# Altium PCB triple_integrated_driver_stepper_motor_controller_arduino_shield.pcbdoc (part 1 of 2)
Units mil, origin at the board's own origin, x right, y up, seen from the top; angles counter-clockwise.
Board outline 5050 x 3825 mil, 2 copper layers (Top Layer, Bottom Layer); 76 components, 119 nets, 386 pads, 303 vias.
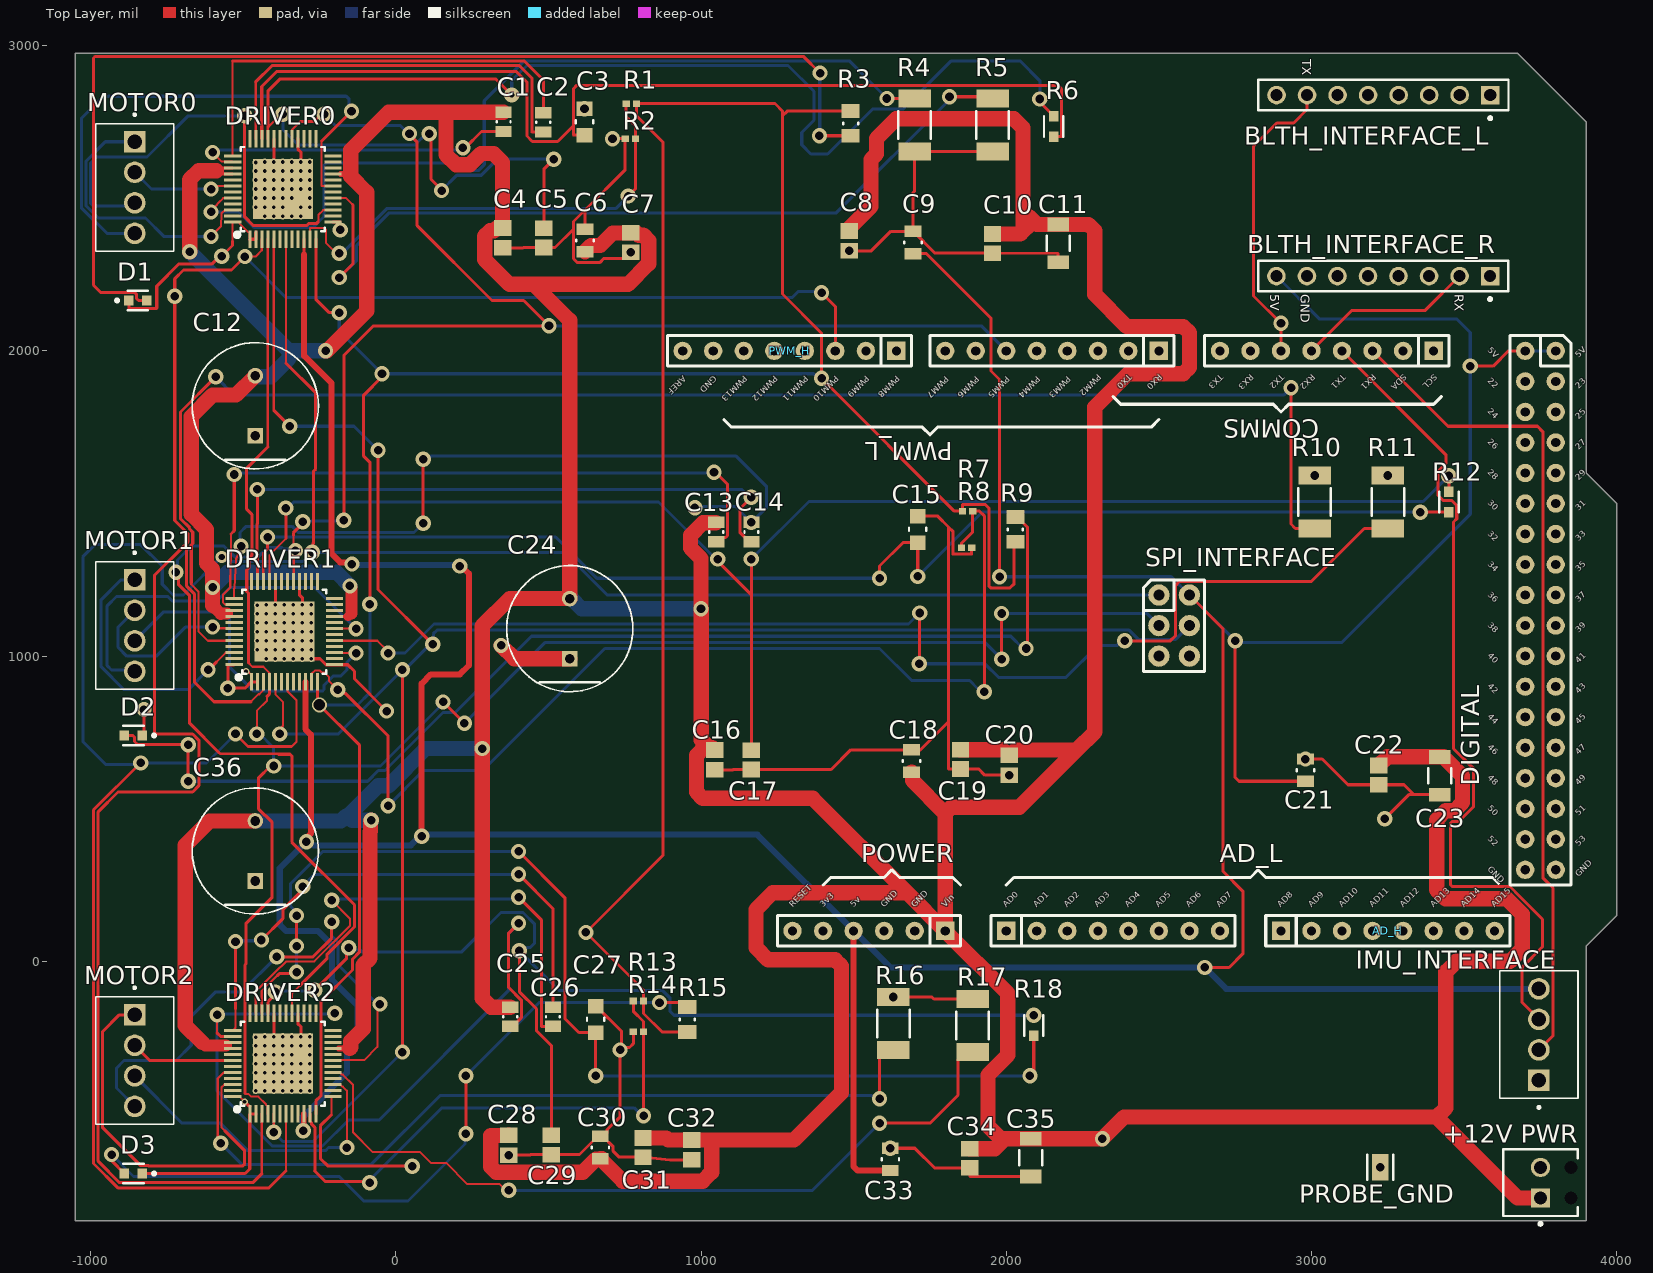
[diagram p0: Top Layer view]
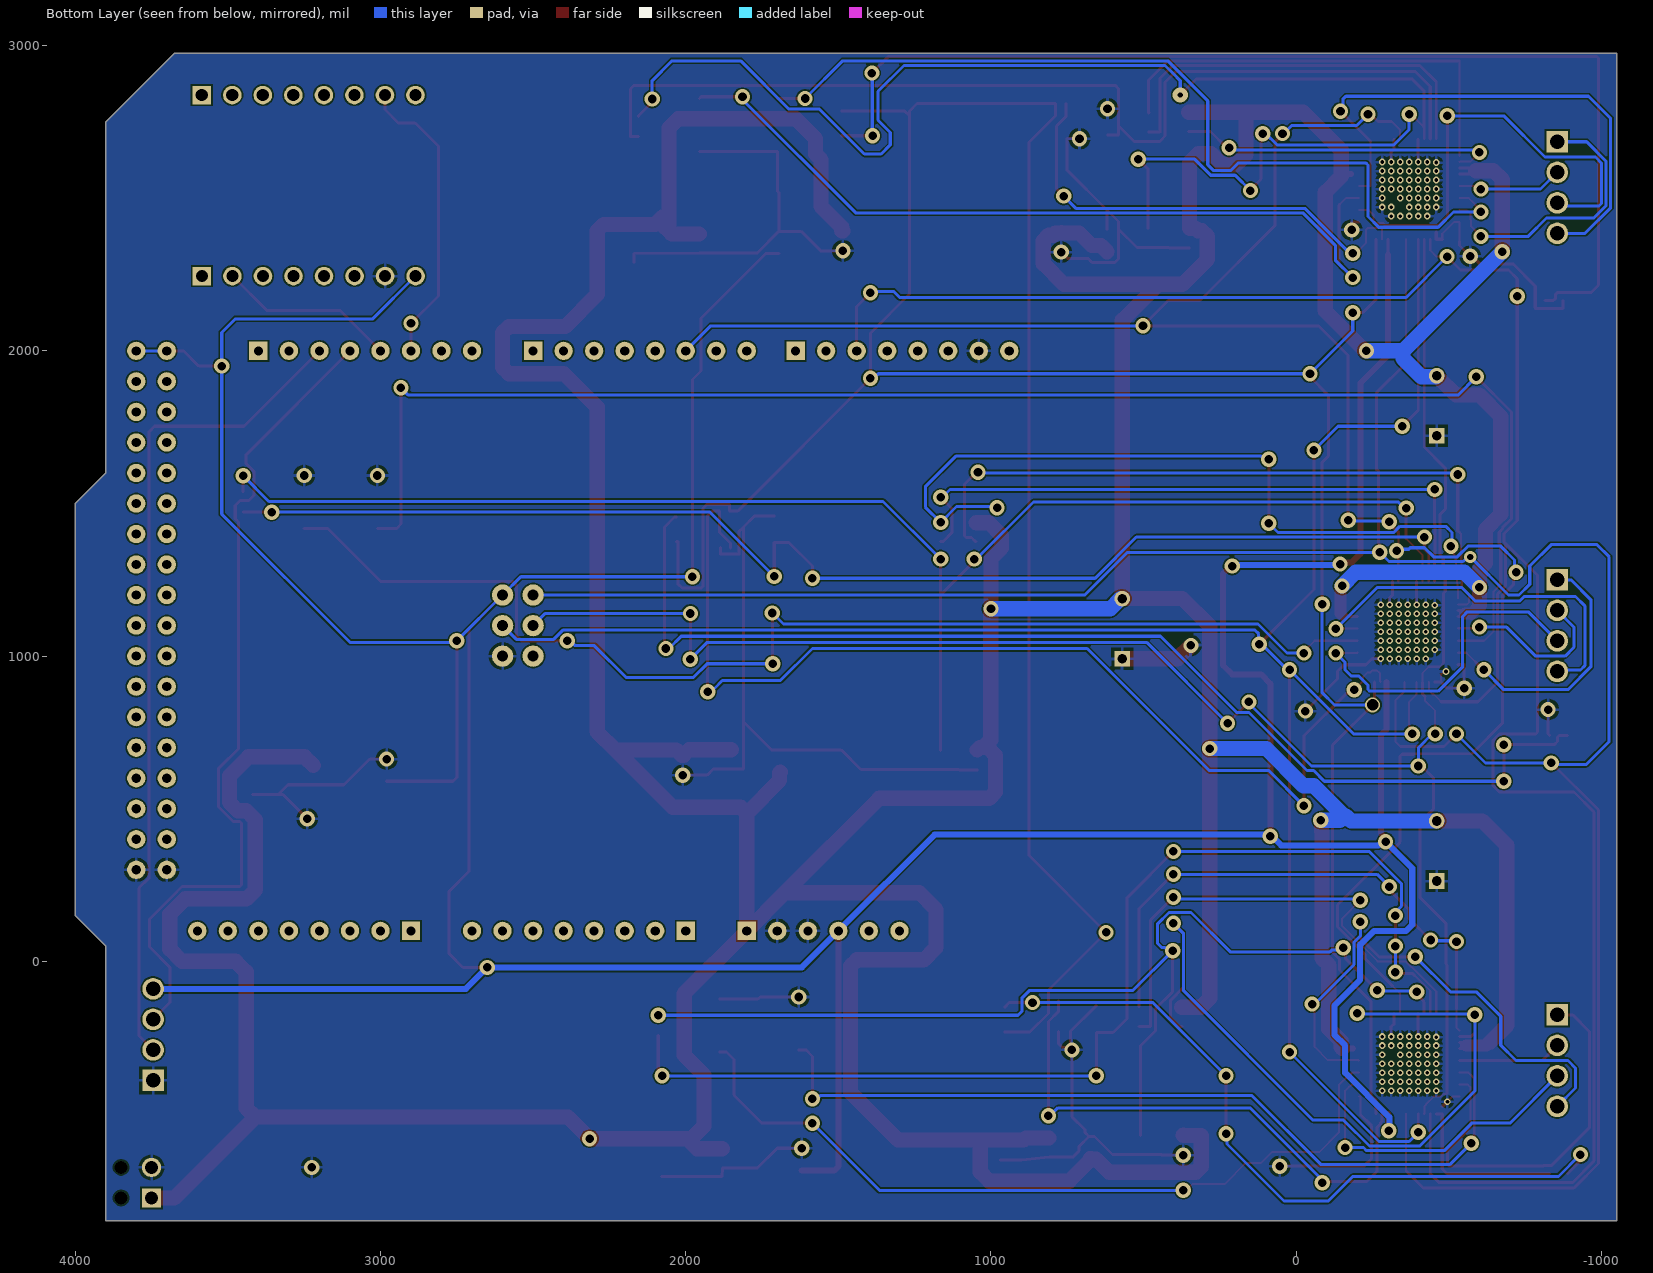
[diagram p1: Bottom Layer view, seen from below]
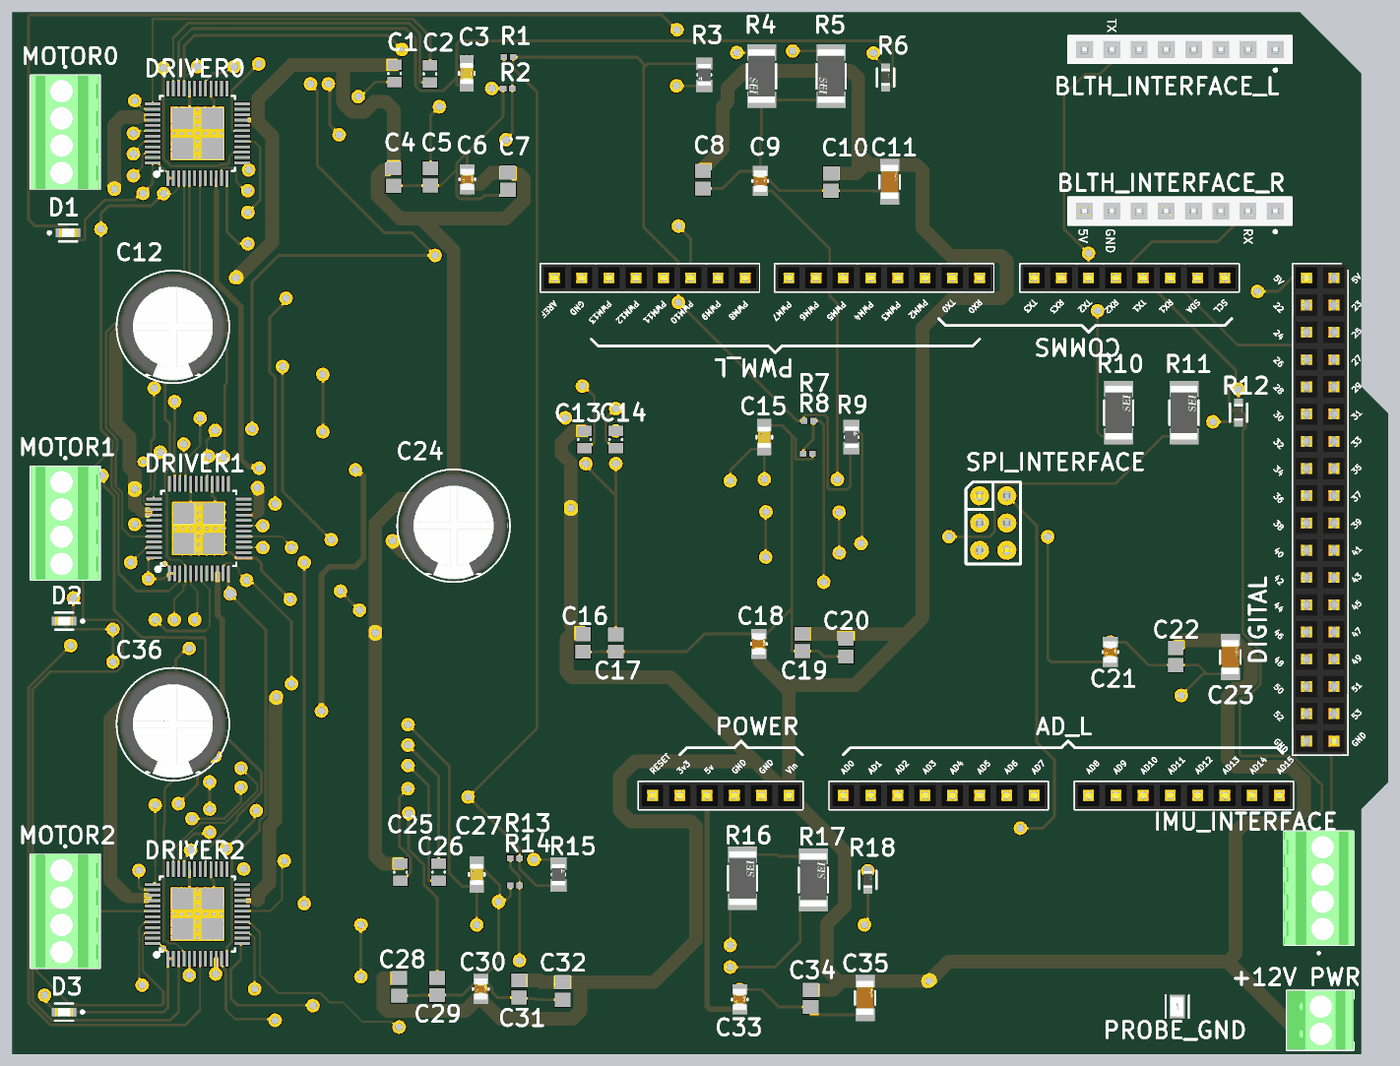
[diagram p3: 3D render of the assembled board from above, using the file's embedded part models]

## Layer stack, top to bottom
Top Solder: solder mask 0.4, Solder Resist, Dk 3.5
Top Layer: signal copper 1.4
Dielectric1: dielectric 12.6, FR-4, Dk 4.8
Bottom Layer: signal copper 1.4
Bottom Solder: solder mask 0.4, Solder Resist, Dk 3.5

## Board outline
-1050,-850 -1050,2975 3675,2975 3900,2750 3900,1600 4000,1500 4000,150 3900,50 3900,-850

## Design rules (kind name [scope] priority, off if disabled: settings)
Clearance [All] p1: gap=5 ignorepadtopadclearanceinfootprint=TRUE
HoleToHoleClearance [All] p1 off: gap=10 allowstackedmicrovias=TRUE
MinimumSolderMaskSliver [All] p1 off: minsoldermaskwidth=4
NetAntennae [All] p1 off: netantennaetolerance=1
PolygonConnect [All] p1: connectstyle=Relief reliefconductorwidth=10 reliefentries=4 polygonreliefangle="90 Angle" airgapwidth=10
RoutingVias [All] p1: holewidth=28 width=50 viastyle="Through Hole" minholewidth=3 minwidth=10 maxholewidth=28 maxwidth=50
SMDNeckDown [All] p1 off: percent=70.000
SilkToSilkClearance [All] p1 off: silktosilkclearance=10
SilkToSolderMaskClearance SilkscreenOverComponentPads [IsPad] p1: minsilkscreentomaskgap=5 clearancetoexposedcopper=TRUE
SolderMaskExpansion [All] p1: expansion=4 istentingtop=FALSE
SupplyNets "Schematic Supply Nets_3" [InNet('VCC_IO')] p1: voltage=0.000
SupplyNets "Schematic Supply Nets" [InNet('CLK16')] p2: voltage=0.000
SupplyNets "Schematic Supply Nets_2" [InNet('VIN')] p3: voltage=0.000
UnRoutedNet [All] p1: checkbadconnections=TRUE
Width [All] p1: maxlimit=60 minlimit=6 preferedwidth=10 minimp=50.000000 maximp=50.000000 favimp=50.000000
24 further rules are at their usual default settings.

## Classes and differential pairs
component class motor2_control: C25 C26 C27 C28 C29 C30 C31 C32 C33 C34 C35 C36 D3 DRIVER2 MOTOR2 R13 R14 R15 R16 R17 R18
component class motor1_control: C13 C14 C15 C16 C17 C18 C19 C20 C21 C22 C23 C24 D2 DRIVER1 MOTOR1 R7 R8 R9 R10 R11 R12
component class motor0_control: C1 C2 C3 C4 C5 C6 C7 C8 C9 C10 C11 C12 D1 DRIVER0 MOTOR0 R1 R2 R3 R4 R5 R6
component class interface_shield_with_microcontroller_board: "+12V PWR" AD_H AD_L Analog BLTH_INTERFACE_L BLTH_INTERFACE_R COMMS DIGITAL IMU_INTERFACE POWER PROBE_GND PWM_H PWM_L SPI_INTERFACE

## Components (designator, comment, footprint, x,y, rotation, side; value= is the part's Value field where it differs from the comment)
"+12V PWR" "1725656" PHOE-1725656-2 3750,-725 r90 top
AD_H "AD_H" "Header 8x1 8.5mm" 2900,100 r0 top locked
AD_L "AD_L" "Header 8x1 8.5mm" 2000,100 r0 top locked
BLTH_INTERFACE_L "PPPC081LFBN-RC" SLIN-PPPC081LFBN-RC_V 3235.39,2837.91 r180 top
BLTH_INTERFACE_R "PPPC081LFBN-RC" SLIN-PPPC081LFBN-RC_V 3235,2245 r180 top
C1 "CAP 4.7uF 10V 0805(2012)" CAPC0805(2012)155_L 353.27,2750 r90 top value=4.7uF
C2 "CAP 4.7uF 10V 0805(2012)" CAPC0805(2012)155_L 483.27,2748.5 r90 top value=4.7uF
C3 "VJ0805Y103KXACW1BC" FP-VJ0805-MFG 618.27,2750 r90 top
C4 "VJ0805Y104KXAMR" CAPC2013X145X48NL20T23 350,2370 r90 top
C5 "C0805S104K5RACTU" CAPC2013X145X50NL20T25 485,2370 r90 top
C6 "CC0805KKX7R7BB475" FP-CC0805-0_85-MFG 620,2361.42 r90 top value="4.7 uF"
C7 "C0805S104K5RACTU" CAPC2013X145X50NL20T25 770,2355 r90 top
C8 "VJ0805Y223KXAAC" CAPC2013X145X48NL20T23 1485,2360 r90 top
C9 "CC0805KFX7R7BB474" FP-CC0805-0_85-MFG 1695,2355 r90 top value="470 nF"
C10 "C0805S104K5RACTU" CAPC2013X145X50NL20T25 1955,2351.5 r90 top
C11 "GRM31CZ72A475KE11L" FP-GRM31C-0_3-e0_3_0_9-MFG 2170,2352.01 r90 top
C12 "EEUFS2A151L" FP-RAD-TH-D_10_0_5-L_25_2-MFG -460,1820 r90 top
C13 "CAP 4.7uF 10V 0805(2012)" CAPC0805(2012)155_L 1050,1406.5 r90 top value=4.7uF
C14 "CAP 4.7uF 10V 0805(2012)" CAPC0805(2012)155_L 1165,1406.5 r90 top value=4.7uF
C15 "VJ0805Y103KXACW1BC" FP-VJ0805-MFG 1710,1415 r90 top
C16 "VJ0805Y104KXAMR" CAPC2013X145X48NL20T23 1045,660 r90 top
C17 "C0805S104K5RACTU" CAPC2013X145X50NL20T25 1165,660 r90 top
C18 "CC0805KKX7R7BB475" FP-CC0805-0_85-MFG 1690,656.42 r90 top value="4.7 uF"
C19 "C0805S104K5RACTU" CAPC2013X145X50NL20T25 1850,661.5 r90 top
C20 "VJ0805Y223KXAAC" CAPC2013X145X48NL20T23 2010,642.48 r90 top
C21 "CC0805KFX7R7BB474" FP-CC0805-0_85-MFG 2980,626.42 r90 top value="470 nF"
C22 "C0805S104K5RACTU" CAPC2013X145X50NL20T25 3220,610 r90 top
C23 "GRM31CZ72A475KE11L" FP-GRM31C-0_3-e0_3_0_9-MFG 3420,607.99 r90 top
C24 "EEUFS2A151L" FP-RAD-TH-D_10_0_5-L_25_2-MFG 570,1090 r90 top
C25 "CAP 4.7uF 10V 0805(2012)" CAPC0805(2012)155_L 375,-181.5 r90 top value=4.7uF
C26 "CAP 4.7uF 10V 0805(2012)" CAPC0805(2012)155_L 515,-181.5 r90 top value=4.7uF
C27 "VJ0805Y103KXACW1BC" FP-VJ0805-MFG 655,-190 r90 top
C28 "VJ0805Y104KXAMR" CAPC2013X145X48NL20T23 370,-602.48 r90 top
C29 "C0805S104K5RACTU" CAPC2013X145X50NL20T25 510,-601.5 r90 top
C30 "CC0805KKX7R7BB475" FP-CC0805-0_85-MFG 670,-610 r90 top value="4.7 uF"
C31 "C0805S104K5RACTU" CAPC2013X145X50NL20T25 810,-610 r90 top
C32 "VJ0805Y223KXAAC" CAPC2013X145X48NL20T23 970,-617.52 r90 top
C33 "CC0805KFX7R7BB474" FP-CC0805-0_85-MFG 1620,-648.58 r90 top value="470 nF"
C34 "C0805S104K5RACTU" CAPC2013X145X50NL20T25 1880,-645 r90 top
C35 "GRM31CZ72A475KE11L" FP-GRM31C-0_3-e0_3_0_9-MFG 2080,-642.99 r90 top
C36 "EEUFS2A151L" FP-RAD-TH-D_10_0_5-L_25_2-MFG -460,361.58 r90 top
COMMS "Communication" "Header 8x1 8.5mm" 3400,2000 r180 top
D1 "LTST-C193TBKT-5A" FP-LTST-C193TBKT-5A-MFG -845,2165 r0 top
D2 "LTST-C193TBKT-5A" FP-LTST-C193TBKT-5A-MFG -859.53,740 r180 top
D3 "LTST-C193TBKT-5A" FP-LTST-C193TBKT-5A-MFG -859.53,-695 r180 top
DIGITAL "IO_36" "HEADER 36X 8MM" 3800,2000 r270 top locked
DRIVER0 "TMC5130A-TA" TMC5130_TQFP48-EP_0.5_7.0X7.0 -370,2530 r0 top
DRIVER1 "TMC5130A-TA" TMC5130_TQFP48-EP_0.5_7.0X7.0 -365,1080 r0 top
DRIVER2 "TMC5130A-TA" TMC5130_TQFP48-EP_0.5_7.0X7.0 -370,-335 r0 top
IMU_INTERFACE "Comment" TE_282834-4 3745,-240 r90 top
MOTOR0 "Comment" TE_282834-4 -855,2535 r270 top
MOTOR1 "Comment" TE_282834-4 -855,1100 r270 top
MOTOR2 "Comment" TE_282834-4 -855,-325 r270 top
POWER "POWER" "Header 6x1 8.5mm" 1800,100 r180 top locked
PROBE_GND "S2751-46R" FP-S2751-46R-MFG 3225,-675 r90 top
PWM_H "PWM_H" "Header 8x1 8.5mm" 1640,2000 r180 top locked
PWM_L "PWM_L" "Header 8x1 8.5mm" 2500,2000 r180 top locked
R1 "RC0402JR-100RL" RESC1005X40X25NL05T10 771.54,2810 r180 top
R2 "RC0402JR-100RL" RESC1005X40X25NL05T10 768.27,2695 r180 top
R3 "MCU0805MD1001BP100" FP-MCU0805-IPC_A 1490,2745 r270 top
R4 "RMCF2010JTR100" FP-RMCF2010-IPC_B 1700,2740 r270 top
R5 "RMCF2010JTR100" FP-RMCF2010-IPC_B 1955,2740 r270 top
R6 "RT0603BRD072R2L" FP-RT0603-MFG 2155,2735 r90 top value=2.2Ω
R7 "RC0402JR-100RL" RESC1005X40X25NL05T10 1873.27,1475 r0 top
R8 "RC0402JR-100RL" RESC1005X40X25NL05T10 1870,1355 r0 top
R9 "MCU0805MD1001BP100" FP-MCU0805-IPC_A 2030,1415 r90 top
R10 "RMCF2010JTR100" FP-RMCF2010-IPC_B 3010,1505 r90 top
R11 "RMCF2010JTR100" FP-RMCF2010-IPC_B 3250,1505 r90 top
R12 "RT0603BRD072R2L" FP-RT0603-MFG 3450,1505 r90 top value=2.2Ω
R13 "RC0402JR-100RL" RESC1005X40X25NL05T10 795,-130 r180 top
R14 "RC0402JR-100RL" RESC1005X40X25NL05T10 795,-230 r180 top
R15 "MCU0805MD1001BP100" FP-MCU0805-IPC_A 955,-190.42 r90 top
R16 "RMCF2010JTR100" FP-RMCF2010-IPC_B 1630,-203.35 r90 top
R17 "RMCF2010JTR100" FP-RMCF2010-IPC_B 1890,-210 r90 top
R18 "RT0603BRD072R2L" FP-RT0603-MFG 2090,-210 r90 top value=2.2Ω
SPI_INTERFACE "ICSP" ICSP 2500,1200 r0 top

## Footprints (in the part's own frame and the unit in brackets; to place one, negate y for a bottom-side part, rotate by r counter-clockwise, add the part's x,y. Pads: shape width x height; smd on the part's side, far side on the other; paste and mask are expansions set on the pad)
CAPC0805(2012)155_L [mm] "Chip Capacitor, Body 2.0x1.2mm, Height 1.55mm, IPC High Density"
  rect 0.95x1.35 smd: 1(-0.8,0) 2(0.8,0)
  silkscreen extent -0.05,-0.58 0.05,0.58, body extent -1.1,-0.72 1.1,0.72, height 1.55
CAPC2013X145X48NL20T23 [mm] "Chip Capacitor, 2-Leads, Body 2.00x1.25mm, IPC Medium Density"
  rect 1.3x1.45 smd: 1(-0.825,0) 2(0.825,0)
  body extent -1.1,-0.72 1.1,0.72, height 1.45
CAPC2013X145X50NL20T25 [mm] "Chip Capacitor, 2-Leads, Body 2.00x1.25mm, IPC Medium Density"
  rect 1.3x1.45 smd: 1(-0.8,0) 2(0.8,0)
  body extent -1.1,-0.72 1.1,0.72, height 1.45
FP-CC0805-0_85-MFG [mm]
  rect 0.95x1.4 smd paste+0 mask+0: 1(-0.925,0) 2(0.925,0)
  silkscreen extent -0.07,-0.73 0.08,0.72, body extent -1.6,-1.05 1.6,1.05, height 0.25
FP-GRM31C-0_3-e0_3_0_9-MFG [mm]
  rect 1.15x1.8 smd paste+0 mask+0: 1(-1.575,0) 2(1.575,0)
  silkscreen extent -0.62,-0.95 0.62,0.95, body extent -2.25,-1.05 2.25,1.05, height 0.25
FP-LTST-C193TBKT-5A-MFG [mm]
  rect 0.8x0.8 smd paste+0 mask+0: 1(-0.75,0) 2(0.75,0)
  silkscreen extent -1.85,-0.8 0.85,0.8, body extent -1.25,-0.55 1.25,0.55, height 0.25
FP-MCU0805-IPC_A [mil]
  rect 45.62x59.38 smd paste+0 mask+0: 1(-40.42,0) 2(40.42,0)
  silkscreen extent -3,-25 3,25, body extent -83,-49 83,49, height 10
FP-RAD-TH-D_10_0_5-L_25_2-MFG [mm]
  rect 1.3x1.3 hole 0.8 paste-2539.97 mask+0: 1(-2.5,0)
  round 1.3 hole 0.8 paste-2539.97 mask+0: 2(2.5,0)
  silkscreen extent -5.25,-5.25 5.25,5.25, body extent -5.35,-5.35 5.35,5.35, height 0.25
FP-RMCF2010-IPC_B [mil]
  rect 59.22x106.54 smd paste+0 mask+0: 1(-86.65,0) 2(86.65,0)
  silkscreen extent -45,-53 45,53, body extent -126,-63 126,63, height 10
FP-RT0603-MFG [mm]
  rect 0.9x0.8 smd paste+0 mask+0: 1(-0.85,0) 2(0.85,0)
  silkscreen extent -0.85,-0.81 0.86,0.8, body extent -1.4,-0.55 1.4,0.55, height 0.25
FP-S2751-46R-MFG [mm]
  rect 2.2x1.4 smd paste+0 mask+0: 1(0,0)
  silkscreen extent -1.05,-1.07 1.05,1.07, body extent -1.2,-0.8 1.2,0.8, height 0.25
FP-VJ0805-MFG [mm]
  rect 1.2x1.3 smd paste+0 mask+0: 1(-1.1,0) 2(1.1,0)
  silkscreen extent -0.12,-0.73 0.13,0.73, body extent -1.8,-0.82 1.8,0.82, height 0.25
"Header 6x1 8.5mm" [mil] "Stackable 6 pin header"
  rect 60x60 hole 30: 1(0,0)
  round 60 hole 30: 2(100,0) 3(200,0) 4(300,0) 5(400,0) 6(500,0)
  silkscreen extent -50,-50 550,50, body extent -50,-50 550,50, height 335
"Header 8x1 8.5mm" [mil] "Stackable 8 pin header"
  rect 60x60 hole 30: 1(0,0)
  round 60 hole 30: 2(100,0) 3(200,0) 4(300,0) 5(400,0) 6(500,0) 7(600,0) 8(700,0)
  silkscreen extent -50,-50 750,50, body extent -50,-50 750,50, height 335
"HEADER 36X 8MM" [mil] "Stackable 10 pin header"
  round 60 hole 30: 1(0,0) 2(0,-100) 3(100,0) 4(100,-100) 5(200,0) 6(200,-100) 7(300,0) 8(300,-100) 9(400,0) 10(400,-100) 11(500,0) 12(500,-100) 13(600,0) 14(600,-100) 15(700,0) 16(700,-100) 17(800,0) 18(800,-100) 19(900,-100) 20(900,0) 21(1000,0) 22(1000,-100) 23(1100,0) 24(1100,-100) 25(1200,0) 26(1200,-100) 27(1300,0) 28(1300,-100) 29(1400,0) 30(1400,-100) 31(1500,0) 32(1500,-100) 33(1600,0) 34(1600,-100) 35(1700,0) 36(1700,-100)
  silkscreen extent -50,-150 1750,50, body extent -50,-150 1750,50, height 335
ICSP [mil]
  round 70 hole 35.43: 1(0,0) 2(100,0) 3(0,-100) 4(100,-100) 5(0,-200) 6(100,-200)
  silkscreen extent -50,-250 150,50, body extent -50,-250 150,50, height 485
PHOE-1725656-2 [mm] "Connector, 2-Leads, Body 6.2x5.4mm, Pitch 2.54mm"
  rect 1.6x1.6 hole 1.1: 1(-1.27,0)
  round 1.6 hole 1.1: 2(1.27,0)
  round 0 hole 1.1 unplated: MH1(-1.27,-2.54) MH2(1.27,-2.54)
  silkscreen extent -3.54,-3.1 2.77,3.1, body extent -2.77,-3.1 2.77,3.1, height 9
RESC1005X40X25NL05T10 [mm] "Chip Resistor, 2-Leads, Body 1.00x0.50mm, IPC Medium Density"
  rect 0.6x0.55 smd: 1(-0.425,0) 2(0.425,0)
  body extent -0.53,-0.27 0.53,0.28, height 0.4
SLIN-PPPC081LFBN-RC_V [mm] "THD, 8-Leads, Body 20.82x2.54mm, Pitch 2.54mm"
  rect 1.55x1.55 hole 1.02: 1(-8.89,0)
  round 1.55 hole 1.02: 2(-6.35,0) 3(-3.81,0) 4(-1.27,0) 5(1.27,0) 6(3.81,0) 7(6.35,0) 8(8.89,0)
  silkscreen extent -10.41,-1.27 10.41,2.04, body extent -10.41,-1.27 10.41,1.27, height 8.5
TE_282834-4 [mm] ".025 SQ Post Terminal Strip Assembly, 1x4 Pins, Vertical, 2.54mm Pitch, Male"
  rect 1.8x1.8 / inner round 1.8 / far side rect 1.8x1.8 hole 1.2: 1(-3.81,0)
  round 1.8 hole 1.2: 2(-1.27,0) 3(1.27,0) 4(3.81,0)
  silkscreen extent -6.16,-3.25 5.31,3.25, body extent -5.31,-3.25 5.31,3.25, height 10
TMC5130_TQFP48-EP_0.5_7.0X7.0 [mm]
  rect 0.25x1.45 smd: 1(-2.75,-4.175) 2(-2.25,-4.175) 3(-1.75,-4.175) 4(-1.25,-4.175) 5(-0.75,-4.175) 6(-0.25,-4.175) 7(0.25,-4.175) 8(0.75,-4.175) 9(1.25,-4.175) 10(1.75,-4.175) 11(2.25,-4.175) 12(2.75,-4.175) 25(2.75,4.175) 26(2.25,4.175) 27(1.75,4.175) 28(1.25,4.175) 29(0.75,4.175) 30(0.25,4.175) 31(-0.25,4.175) 32(-0.75,4.175) 33(-1.25,4.175) 34(-1.75,4.175) 35(-2.25,4.175) 36(-2.75,4.175)
  rect 1.45x0.25 smd: 13(4.175,-2.75) 14(4.175,-2.25) 15(4.175,-1.75) 16(4.175,-1.25) 17(4.175,-0.75) 18(4.175,-0.25) 19(4.175,0.25) 20(4.175,0.75) 21(4.175,1.25) 22(4.175,1.75) 23(4.175,2.25) 24(4.175,2.75) 37(-4.175,2.75) 38(-4.175,2.25) 39(-4.175,1.75) 40(-4.175,1.25) 41(-4.175,0.75) 42(-4.175,0.25) 43(-4.175,-0.25) 44(-4.175,-0.75) 45(-4.175,-1.25) 46(-4.175,-1.75) 47(-4.175,-2.25) 48(-4.175,-2.75)
  rrect0% 5x5 smd paste-254: 49(0,0)
  silkscreen extent -3.9,-3.9 3.5,3.5, body extent -3.5,-3.5 3.5,3.5, height 1

## Part data
"+12V PWR": library part CMP-2000-05299-1, "Male Header, Pitch 2.54 mm, 1 x 2 Position, Height 9 mm, Tail Length 3.5 mm", Colour=Green, Manufacturer="Phoenix Contact", Content=250pc(s), Datasheet URL=http://datasheet.octopart.com/1725656-Phoenix-Contact-datasheet-5302866.pdf, Datasheet Version=Apr-08, Industrial packaging=Yes, Manufacturer part No.=1725656, Manufacturer URL=http://www.phoenixcontact.com/, Number of Contacts=2, Pitch=2.54mm, Type=MPT0,5/2-2,54
AD_H PWM_L: Supplier Part Number 1=2698940, Supplier 1=Arrow, Supplier 2=Arrow, Supplier 3=Digi-Key, Supplier 4=Arrow, Supplier Part Number 2=2698939, Supplier Part Number 3=SAM1198-08-ND, Supplier Part Number 4=2698925
AD_L COMMS PWM_H: Supplier Part Number 1=SAM1198-08-ND, Supplier 1=Digi-Key, Supplier 2=Arrow, Supplier 3=Arrow, Supplier 4=Arrow
  AD_L: Supplier 5=Arrow, Supplier Part Number 2=2698939, Supplier Part Number 3=2698940, Supplier Part Number 4=43085273, Supplier Part Number 5=2698925
  COMMS PWM_H: Supplier Part Number 2=2698940, Supplier Part Number 3=2698939, Supplier Part Number 4=2698925
BLTH_INTERFACE_L BLTH_INTERFACE_R: library part CMP-002-00028-2, "Female Header, Pitch 2.54 mm, 1 x 8 Position, Height 8.5 mm, Tail Length 3.2 mm, -40 to 105 degC, RoHS, Bulk", Manufacturer=Sullins, Max Operating Temperature=105°C, Min Operating Temperature=-40°C, Package Description="Female Header, Pitch 2.54 mm, 1 x 8 Position, Height 8.5 mm, Tail Length 3.2 mm", Case/Package=PPPC081LFBN-RC, Connector Type=Header, Datasheet URL=http://sullinscorp.com/catalogs/101_PAGE114-115_.100_FEMALE_HDR.pdf, Datasheet Version=Jan-15, Gender=Female, Mounting Technology=TH, Package Reference=PPPC081LFBN-RC, RoHS Compliant=Unknown
C1 C2 C13 C14 C25 C26: library part CMP-1036-04882-1, "CAP 4.7uF 10V ±10% 0805 (2012 Metric) Thickness 1.55mm SMD", Case-EIA=0805, Case-Metric=2012, Rated Voltage="10 V", Tolerance=Â±10%, Max Thickness="1.55 mm", Technology=SMT
C3 C15 C27: library part CMP-2007-03438-2, Capacitance=10nF, Case Code (Imperial)=0805, Case Code (Metric)=2012, Dielectric=X7R, Dielectric Material=Tantalum, Max Operating Temperature=125°C, Min Operating Temperature=-55°C, Tolerance=10%, Voltage=50V, Case/Package=0805, Depth=1.25mm, Height=1.45mm, Lead Free="Lead Free", Length=2mm, Mount="Surface Mount", NexarPartId=39476146, Number of Pins=2, Packaging="Cut Tape", Radiation Hardening=No, REACH SVHC=Unknown, RoHS=Compliant, Schedule B="8532240020, 8532240020", Termination=SMD/SMT, Thickness=939.8µm, Voltage Rating=50V, Voltage Rating (DC)=50V, Width=1.2446mm
C4 C16 C28: library part CMP-2007-01705-1, Manufacturer=Vitramon, Part Number=VJ0805Y104KXAMR
C5 C7 C10 C17 C19 C22 C29 C31 C34: library part CMP-2007-01227-1, Manufacturer=Kemet, Part Number=C0805S104K5RACTU
C6 C18 C30: library part CMP-03422-000207-1, "CAP CER 4.7UF 16V X7R 0805", Capacitance="4.7 uF", Manufacturer=Yageo, Package=CC0805-0.85, Temperature="-30°C to +85°C", Temperature Characteristic=X7R, Temperature Range High=+85°C, Temperature Range Low=-30°C, Tolerance=0.1, Voltage Rating="16 V", Automotive=No, Category=Cap, ComponentLink2Description=Datasheet, ComponentLink2URL=http://www.yageo.com/documents/recent/UPY-GPHC_Y5V_6.3V-to-50V_8.pdf, Device Class L1="Passive Components", Device Class L2=Capacitors, Device Class L3="Ceramic Capacitors", Digikey Description="CAP CER 4.7UF 16V X7R 0805", Footprint Url=http://www.yageo.com/exep/pages/download/literatures/UPY-C_GEN_24.pdf, Height=0.95mm, Ipc Land Pattern Name=CAPC200125X85, Lead Free=Yes, Manufacturer Part Number=CC0805KKX7R7BB475, Material=Ceramic, Mouser Description="Multilayer Ceramic Capacitors MLCC - SMD/SMT 4.7M pF 10% 16 Volts", Octopart=https://octopart.com/cc0805kkx7r7bb475-yageo-34429188, RoHS=TRUE
C8 C20 C32: library part CMP-2007-01723-1, Manufacturer=Vitramon, Part Number=VJ0805Y223KXAAC
C9 C21 C33: library part CMP-03422-001203-1, "CC0805 470 nF X7R 10.00% 16 V", Capacitance="470 nF", Manufacturer=Yageo, Package=CC0805-0.85, Temperature="-30°C to +85°C", Temperature Characteristic=X7R, Temperature Range High=+85°C, Temperature Range Low=-30°C, Tolerance=0.1, Voltage Rating="16 V", Automotive=No, Category=Cap, ComponentLink2Description=Datasheet, ComponentLink2URL=http://www.yageo.com/documents/recent/UPY-GPHC_Y5V_6.3V-to-50V_8.pdf, Device Class L1="Passive Components", Device Class L2=Capacitors, Device Class L3="Ceramic Capacitors", Footprint Url=http://www.yageo.com/exep/pages/download/literatures/UPY-C_GEN_24.pdf, Height=0.95mm, Ipc Land Pattern Name=CAPC200125X85, Lead Free=Yes, Manufacturer Part Number=CC0805KFX7R7BB474, Material=Ceramic, Mouser Description="Multilayer Ceramic Capacitors MLCC - SMD/SMT 470nF 16V X7R 10%", Octopart=https://octopart.com/cc0805kfx7r7bb474-yageo-24732839, RoHS=TRUE
C11 C23 C35: library part CMP-06035-056253-1, "Chip Multilayer Ceramic Capacitors for General Purpose, 1206, 4.7uF, X7R, 15%, 10%, 100V"
C12 C24 C36: library part CMP-05427-000502-1, "Aluminum Electrolytic Capacitors (Radial Lead Type) 150uF ±20% 100V", RoHS Compliant=Yes
D1 D2 D3: library part CMP-2000-06624-2, "LED BLUE CLEAR CHIP SMD", Case Code (Imperial)=0603, Case Code (Metric)=1608, Color=Blue, Forward Current=20mA, Forward Voltage=2.8V, Lens Color=Colorless, Max Operating Temperature=80°C, Min Operating Temperature=-20°C, Package Quantity=1, Power Dissipation=76mW, Reverse Voltage=5V, Test Current=5mA, Case/Package=0603, Depth=0.8mm, Dominant Wavelength=475nm, Height=0.35mm, Illumination Color=Blue, Lead Free="Lead Free", Length=1.6mm, Lens Style=Diffused, Lens Transparency=Clear, Luminous Intensity=15mcd, Mount="Surface Mount", Number of Elements=1, Number of LEDs=1, Number of Pins=2, Packaging="Tape and Reel", Radiation Hardening=No, RoHS Compliant=Yes, Viewing Angle=130°, Width=0.8mm
DIGITAL: Supplier Part Number 1=SAM1196-18-ND, Supplier 1=Digi-Key, Supplier 2=Arrow, Supplier 3=Arrow, Supplier 4=Arrow, Supplier 5=Arrow, Supplier Part Number 2=48117090, Supplier Part Number 3=46093326, Supplier Part Number 4=2698278, Supplier Part Number 5=2698268
DRIVER0 DRIVER1 DRIVER2: "High voltage(up to 46V) controller for two-phase bipolar stepper motor, with SPI, Step/Dir, UART, TQFP48-EP(7x7)", Manufacturer=TRINAMIC, Datasheet=http://www.trinamic.com/_scripts/download.php?file=_articles%2Fproducts%2Fintegrated-circuits%2Ftmc5130%2F_datasheet%2FTMC5130_datasheet.pdf, Distributor#1=Digikey, Geometry.Height=1,2mm, MF=TRINAMIC, MPN=TMC5130A-TA, Ordercode - Distri#1=1460-1124-ND, Ordercode - Manu#1=TMC5130A-TA
IMU_INTERFACE MOTOR0 MOTOR1 MOTOR2: library part 282834-4, "Conn; Term Blk; PCB; Wire Receptacle; 4; 2.54mm; 30-16AWG; Green; 10A;150V; M1.6", Package=None, Centerline_Pitch="2.54 mm[.1 in]", Check_prices=https://www.snapeda.com/parts/282834-4/TE+Connectivity+AMP+Connectors/view-part/?ref=eda, EU_RoHS_Compliance="Compliant with Exemptions", MF="TE Connectivity", MP=282834-4, Number_of_Positions=4, SnapEDA_Link=https://www.snapeda.com/parts/282834-4/TE+Connectivity+AMP+Connectors/view-part/?ref=snap
POWER: Supplier Part Number 1=52553843, Supplier 1=Arrow, Supplier 2=Arrow, Supplier 3=Digi-Key, Supplier 4=Arrow, Supplier 5=Arrow, Supplier Part Number 2=2699075, Supplier Part Number 3=SAM1198-06-ND, Supplier Part Number 4=2699089, Supplier Part Number 5=2699088
PROBE_GND: library part CMP-15817-000010-1, "PC TEST POINT NATURAL", Color=Natural, Body Material=Brass, Material="Copper Alloy", Mount="Surface Mount", Packaging="Cut Tape", Plating=Tin
R1 R2 R7 R8 R13 R14: library part CMP-2002-06970-1, Manufacturer=Yageo, Part Number=RC0402JR-100RL
R3 R9 R15: library part CMP-02407-000288-1, "RES 1.05K OHM 0.5% 1/5W 0805", Case Code (Imperial)=0805, Case Code (Metric)=2012, Max Operating Temperature=155°C, Min Operating Temperature=-55°C, Power Rating=200mW, Resistance=1kR, Tolerance=0.1%, Voltage Rating=150V, Case/Package=0805, Composition="Thin Film", Height=0.52mm, Length=2mm, Packaging="Tape and Reel", Weight=0.000162oz, Width=1.25mm
R4 R5 R10 R11 R16 R17: library part CMP-26527-004988-1, "0.1Ω ±5% 0.75W 2010 Thick Film Chip Resistor AEC-Q200 compliant", Case Code (Imperial)=2010, Case Code (Metric)=5025, Case/Package=0201, Max Operating Temperature=155°C, Max Power Dissipation=750mW, Min Operating Temperature=-55°C, Resistance=100mR, Resistor Type="Thick Film", Temperature Coefficient=200ppm/°C, Tolerance=5%, Construction=Rectangular, Contact Plating=Tin, Depth=0.3mm, Features="Automotive AEC-Q200", Height=0.028inch, Length=0.197inch, Military Standard=Not, Mount="Surface Mount", Number of Terminations=2, Packaging="Tape and Reel", Radiation Hardening=No, RoHS Compliant=Yes, Series=RMCF, Width=0.098inch
R6 R12 R18: library part CMP-03412-032977-1, "RT0603 2.2Ω 0.1W 25 ppm/°C 0.10%", Manufacturer=Yageo, Package=RT0603, Power Rating=0.1W, Resistance=2.2Ω, Temperature="-55°C to +155°C", Temperature Coefficient="25 ppm/°C", Temperature Range High=+155°C, Temperature Range Low=-55°C, Tolerance=0.001, Voltage Rating=75V, Automotive=No, Category=Res, ComponentLink2Description=Datasheet, ComponentLink2URL=http://www.yageo.com/documents/recent/PYu-RT_1-to-0.01_RoHS_L_9.pdf, Composition="Thin Film", Device Class L1="Passive Components", Device Class L2=Resistors, Device Class L3="Chip SMD Resistors", Footprint Url=http://www.yageo.com/exep/pages/download/literatures/PYu-R_Mount_10.pdf, Height=0.55mm, Ipc Land Pattern Name=RESC16080X45, Lead Free=Yes, Manufacturer Part Number=RT0603BRD072R2L, Octopart=https://octopart.com/rt0603brd072r2l-yageo-80827805, RoHS=TRUE, Series=RT
SPI_INTERFACE: Supplier Part Number 1=SAM1185-06-ND, Supplier 1=Digi-Key, Supplier 2=Arrow, Supplier 3=Arrow, Supplier 4=Arrow, Supplier 5=Digi-Key, Supplier Part Number 2=2699117, Supplier Part Number 3=43862781, Supplier Part Number 4=2699091, Supplier Part Number 5=SAM1196-06-ND

## Via types
v1: diameter 50, hole 28, Top Layer to Bottom Layer, 157 vias
v2: diameter 22, hole 12, Top Layer to Bottom Layer, tented both sides, 141 vias
v3: diameter 23, hole 13, Top Layer to Bottom Layer, 1 vias
v4: diameter 22, hole 12.5, Top Layer to Bottom Layer, 1 vias
v5: diameter 40, hole 20, Top Layer to Bottom Layer, 1 vias
v6: diameter 50, hole 18, Top Layer to Bottom Layer, 1 vias
v7: diameter 50, hole 38, Top Layer to Bottom Layer, 1 vias

## Nets (pads, with @x,y where several pads share a name; then routed paths per layer and width w, separated by ;. In a path a pad name is that pad's centre, name@x,y a point inside that pad or via, vN(x,y) a via of type N, cw(c..) or ccw(c..) an arc to the next point about the centre after c; other vN are vias at no path point)
3V3: POWER.5
5V: BLTH_INTERFACE_R.8 C9.1 C21.1 C33.1 DIGITAL.1 DIGITAL.2 DRIVER0.10 DRIVER1.10 DRIVER2.10 IMU_INTERFACE.4 POWER.4 SPI_INTERFACE.2 | length 16195.4
  Top Layer w10: DRIVER0.10@-301.1,2365.63 -301.1,2317.33 -300,2316.23 ; C9.1@1695,2318.58 1738.42,2318.58 1950,2107 1950,1934 1978,1906 v1(1978,1260) ; SPI_INTERFACE.2@2600,1200 2710,1090 2710,295 2775,230 2775,24.86 2730.14,-20 v1(2650,-20) ; v1(2750,1050) 2750,602.5 2762.5,590 C21.1@2980,590 ; v1(3520,1950) 3595,1950 3645,2000 DIGITAL.2@3700,2000
  Top Layer w18: v1(-303.03,-555.06) -301.87,-533.71 DRIVER2.10@-301.1,-499.37
  Top Layer w19: -296.1,865 DRIVER1.10@-296.1,915.63
  Top Layer w20: -300,2316.23 -300,1984 -210,1894 -210,1335 -182.13,1307.13 -149.35,1307.13 v1(-143.61,1301.39) ; -296.1,865 -296.1,761.1 -278.11,743.11 -278.11,418.56 -292.75,403.91 v1(-292.75,392.25) ; v1(85,410) 85,910 115,940 210,940 240,970 240,1270 215,1295 v1(210,1295) ; POWER.4@1500,100 1500,-672.5 1512.5,-685 C33.1@1620,-685
  Bottom Layer w10: v1(1978,1260) 2540,1260 SPI_INTERFACE.2@2600,1200 v1(2750,1050) 2755,1045 3100,1045 3520,1465 v1(3520,1950) 3520,2060 3475,2105 3025,2105 BLTH_INTERFACE_R.8@2885,2245 ; DIGITAL.2@3700,2000 DIGITAL.1@3800,2000
  Bottom Layer w20: v1(-303.03,-555.06) -305,-553.09 -305,-510 -160,-365 -160,-275.25 -125,-240.25 -125,-145 -137.75,-132.25 -209.26,-60.74 -209.26,54.26 -255,100 -360,100 -380,120 -380,305 v1(-292.75,392.25) -281.93,392.25 -269.68,380 48.99,380 83.99,415 1185,415 POWER.4@1500,100 1620,-20 v1(2650,-20) 2720,-90 IMU_INTERFACE.4@3745,-90 ; v1(-143.61,1301.39) -140.41,1298.2 206.8,1298.2 v1(210,1295)
5V_OUT: C5.2 DRIVER0.33 R6.2 | length 4845.8
  Top Layer w6.89: DRIVER0.33@-419.21,2694.37 -419.21,2731.79 -376,2775 v1(-370,2775)
  Top Layer w10: -419.21,2731.79 -419.21,2850.79 -380,2890 328.15,2890 v6(380,2838.15) ; v1(110,2711.63) 115.44,2706.19 115.44,2562.32 150,2527.76 v1(150,2525) ; C5.2@485,2401.5 485,2595 v1(518,2628) ; v1(2110,2825) 2110,2815.43 2155,2770.43 R6.2@2155,2768.46
  Bottom Layer w10: v1(-370,2775) -370,2725 -320,2675 62.99,2675 99.62,2711.63 v1(110,2711.63) ; v1(150,2525) 200.2,2575.2 280.2,2575.2 333,2628 v1(518,2628) ; v6(380,2838.15) 380,2885.2 404.8,2910 405,2910 430,2935 1285,2935 1370,2850 1370,2755.58 1330,2715.58 1330,2674.8 1359.8,2645 1415,2645 1561.65,2791.65 1661.65,2791.65 1820,2950 2045,2950 2110,2885 v1(2110,2825)
AD0: AD_L.1
AD1: AD_L.2
AD2: AD_L.3
AD3: AD_L.4
AD4: AD_L.5
AD5: AD_L.6
AD6: AD_L.7
AD7: AD_L.8
AD8: AD_H.1
AD9: AD_H.2
AD10: AD_H.3
AD11: AD_H.4
AD12: AD_H.5
AD13: AD_H.6
AD14: AD_H.7
AD15: AD_H.8
AREF: PWM_H.8
CSN: DRIVER0.3 DRIVER1.3 DRIVER2.3 PWM_H.3 | length 7422.7
  Top Layer w6.89: v1(-494,2309) -458.9,2309 -438.9,2329 DRIVER0.3@-438.9,2365.63 ; -474.51,850.49 -450,875 -447.09,875 -435.37,886.72 -435.37,914.15 DRIVER1.3@-433.9,915.63 ; -438.9,-695.9 DRIVER2.3@-438.9,-499.37
  Top Layer w10: v1(-494,2309) -538,2265 -695,2265 -724,2236 v1(-724,2179) -724,1444 -680,1400 -680,1375 -685,1370 ; -474.51,850.49 -595.49,850.49 -660,915 -660,1204.01 -685,1229.01 -685,1370 ; -438.9,-695.9 -468,-725 -904.69,-725 -975,-654.69 -975,490 -910,555 -665.5,555 -645,575.5 -645,724.5 -665.5,745 -784.14,745 -790,750.86 -790,1265 -685,1370 ; v1(1395,2190) 1440,2145 PWM_H.3@1440,2000
  Bottom Layer w10: v1(-494,2309) -360,2175 1299.14,2175 1319.14,2195 1390,2195 v1(1395,2190)
DRV_ENN: DRIVER0.29 DRIVER1.29 DRIVER2.29 PWM_L.6 | length 6869.1
  Top Layer w6.89: DRIVER2.29@-340.47,-170.63 -340.47,-105.47 -314.55,-79.55 ; DRIVER0.29@-340.47,2694.37 -340.47,2723.53 -312.5,2751.5 ; DRIVER1.29@-335.47,1244.37 -334,1245.85 -334,1333.52 v1@-335.47,1335 ; -335.47,1394.53 v1@-335.47,1335 ; v1(-328.52,1345) -335.47,1338.05 v1@-335.47,1335
  Top Layer w10: v1(-720,1275) -712.35,1267.35 -712.35,1235.15 -675,1197.8 -675,780 -578.89,683.89 -576.01,681.01 -386.13,678.9 cw(c-386.28,668.9) -383.47,678.5 -346.33,678.5 -343.4,675.57 -340.47,672.64 -340.47,390.47 -135,185 -135,113.04 -224.78,23.26 -224.78,10.22 -314.55,-79.55 ; -335.47,1394.53 -335.47,1403.7 -305,1434.18 v1(-305,1440) ; -312.5,2751.5 -268.07,2751.5 -244.57,2775 v1(-235,2775) ; v1(-170,1445) -170,1985 -73,2082 v1(502,2082) 419,2165 315,2165 70,2410 70,2683.43 45,2708.43 v1(45,2711.72)
  Bottom Layer w10: v1(-720,1275) -715,1280 -715,1315 -670,1360 -562.57,1360 -527.57,1325 -450,1325 -420,1355 -373.52,1355 -368.52,1350 -333.52,1350 v1(-328.52,1345) ; v1(-305,1440) -302.5,1442.5 -172.5,1442.5 v1(-170,1445) ; v1(-235,2775) -197.96,2737.96 14.67,2737.96 40.91,2711.72 v1(45,2711.72) ; v1(502,2082) 1918,2082 PWM_L.6@2000,2000
GND: "+12V PWR.2" BLTH_INTERFACE_R.7 C3.2 C4.1 C5.1 C6.2 C7.1 C8.1 C9.2 C10.1 C11.1 C12.1 C15.2 C16.1 C17.1 C18.2 C19.1 C20.1 C21.2 C22.1 C23.1 C24.1 C27.2 C28.1 C29.1 C30.2 C31.1 C32.1 C33.2 C34.1 C35.1 C36.1 D1.1 D2.1 D3.1 DIGITAL.35 DIGITAL.36 DRIVER0.1 DRIVER0.2 DRIVER0.13 DRIVER0.28 DRIVER0.32 DRIVER0.48 DRIVER0.49 DRIVER1.1 DRIVER1.2 DRIVER1.13 DRIVER1.28 DRIVER1.32 DRIVER1.48 DRIVER1.49 DRIVER2.1 DRIVER2.2 DRIVER2.13 DRIVER2.28 DRIVER2.32 DRIVER2.48 DRIVER2.49 IMU_INTERFACE.1 POWER.2 POWER.3 PROBE_GND.1 PWM_H.7 R2.2 R4.2 R5.2 R8.2 R10.2 R11.2 R14.2 R16.2 R17.2 SPI_INTERFACE.6 | length 10368.1
  Top Layer w6.89: -535,2360 -535,2421.73 DRIVER0.48@-534.37,2421.73 -516.44,2421.73 -478.27,2383.56 DRIVER0.1@-478.27,2365.63 ; DRIVER2.48@-534.37,-443.27 -510.75,-443.27 -495,-459.02 v4(-495,-460) ; v3(-490,950) -489.4,949.4 -483.42,949.4 -474.74,940.73 -474.74,917.11 DRIVER1.1@-473.27,915.63 ; -211,-503 -211,-443.27 DRIVER2.13@-205.63,-443.27
  Top Layer w10: D1.1@-874.53,2165 -874.53,2140 -873.53,2139 -784,2139 -783,2140 -783,2212 -710,2285 -601.57,2285 -576.57,2310 v1(-570,2310) -535,2345 -535,2360 ; D3.1@-830,-695 -493.27,-695 -478.27,-680 DRIVER2.1@-478.27,-499.37 DRIVER2.2@-458.58,-499.37 ; D2.1@-830,740 -825,745 v1(-825,825) ; v1(-550,895) -493.9,895 DRIVER1.1@-473.27,915.63 DRIVER1.2@-453.58,915.63 ; v1@-545.7,909.18 -550,913.48 -550,971.65 -549.92,971.73 DRIVER1.48@-529.37,971.73 ; v4(-495,-460) -494.17,-460 DRIVER2.1@-478.35,-475.83 ; DRIVER0.1@-478.27,2365.63 DRIVER0.2@-458.58,2365.63 DRIVER0.2@-458.58,2389.09 ; DRIVER0.49@-430,2440.47 v2(-429.05,2441.42) ; v2(-399.53,-246.42) DRIVER2.32@-399.53,-170.63 ; v2(-399.53,2618.58) DRIVER0.32@-399.53,2694.37 ; v2(-394.53,1168.58) DRIVER1.32@-394.53,1244.37 ; DRIVER2.28@-320.79,-170.63 -320.71,-170.71 -320.71,-204.29 -310,-215 -310,-245.47 v2(-310.94,-246.42) ; DRIVER0.28@-320.79,2694.37 -320.86,2694.3 -320.86,2660.86 -310,2650 -310,2619.53 v2(-310.94,2618.58) ; DRIVER1.28@-315.79,1244.37 -315.79,1200.79 -305,1190 -305,1169.53 v2(-305.94,1168.58) ; v2(-276.42,991.42) -248.24,991.42 -228.55,971.73 DRIVER1.13@-200.63,971.73 -157.09,971.73 -135.35,950 -135.35,925.35 v1(-30,820) ; -211,-503 -247,-539 -247,-646 -223,-670 52.54,-670 v1(53.77,-671.23) ; DRIVER0.13@-205.63,2421.73 -182.17,2421.73 -182.09,2421.65 v1(-182.09,2396.05) ; C4.1@350,2337.52 417,2337.52 417.98,2338.5 C5.1@485,2338.5 522,2338.5 582,2398.5 ; v1(370,-634.96) 439,-634.96 440.97,-632.99 C29.1@510,-632.99 601.73,-632.99 661.14,-573.58 C30.2@670,-573.58 C30.2@678.86,-573.58 ; C6.2@620,2397.83 620,2461.46 ; C27.2@655,-146.69 656.97,-146.69 740,-229.72 v1@740,-285 ; v1(710,2695) R2.2@751.54,2695 751.54,2593 620,2461.46 ; v1(735,-290) 735,-508.58 692.56,-551.02 692.56,-559.88 C30.2@678.86,-573.58 ; v1@742.65,-282.35 765.55,-282.35 778.27,-269.63 R14.2@778.27,-230 ; v1(770,2323.5) 749.41,2302.91 682.44,2302.91 669.52,2290 593.86,2290 582,2301.86 582,2398.5 ; C32.1@970,-650 898.5,-650 C31.1@810,-641.5 732,-641.5 712.28,-621.78 712.28,-607 C30.2@678.86,-573.58 ; C16.1@1045,627.52 1104,627.52 1104.98,628.5 C17.1@1165,628.5 1426.5,628.5 1490.83,692.83 C18.2@1690,692.83 1719.17,692.83 1811,784.67 ; v1(1485,2327.52) 1558,2327.52 1621.9,2391.42 C9.2@1695,2391.42 ; v1(1620,-612.17) 1700.67,-612.17 1765,-676.5 C34.1@1880,-676.5 1881,-705 C35.1@2080,-705 ; v1(1630,-116.7) 1756,-116.7 1762.65,-123.35 R17.2@1890,-123.35 ; C15.2@1710,1458.31 1775.69,1458.31 1811,1423 ; R8.2@1886.73,1355 1886.73,1335 1885.73,1334 1826,1334 1825,1335 1825,1409 1811,1423 ; R5.2@1955,2653.35 R4.2@1700,2653.35 1700,2524 1695,2519 C9.2@1695,2391.42 ; v1(2010,610) 1930,610 1910,630 C19.1@1850,630 1812,630 1811,631 1811,784.67 ; C11.1@2170,2290 2170,2319 C10.1@1955,2320 1766.42,2320 C9.2@1695,2391.42 ; v1(2980,662.83) 3035,662.83 3119.33,578.5 C22.1@3220,578.5 3303,578.5 3335.52,545.98 ; v1(3010,1591.65) R10.2@3033.66,1591.65 ; v1(3240,466.98) 3319,545.98 3335.52,545.98 ; C23.1@3420,545.98 3335.52,545.98 ; 582,2398.5 582,2423.46 620,2461.46 ; 1811,784.67 1811,1423
  Top Layer w50: v1(345,1035) 388.43,991.57 v1(570,991.57)
  other v1: 3225,-675 3250,1591.65 618.27,2793.31
  other v2: -458.58,-423.58 -429.05,-423.58 -399.53,-423.58 -370,-423.58 -340.47,-423.58 -310.94,-423.58 -281.42,-423.58 -458.58,-394.06 -429.05,-394.06 -399.53,-394.06 -370,-394.06 -340.47,-394.06 -310.94,-394.06 -281.42,-394.06 -458.58,-364.53 -429.05,-364.53 -399.53,-364.53 -370,-364.53 -340.47,-364.53 -310.94,-364.53 -281.42,-364.53 -458.58,-335 -429.05,-335 -399.53,-335 -370,-335 -340.47,-335 -310.94,-335 -281.42,-335 -458.58,-305.47 -429.05,-305.47 -399.53,-305.47 -370,-305.47 -340.47,-305.47 -281.42,-305.47 -458.58,-275.94 -429.05,-275.94 -399.53,-275.94 -370,-275.94 -340.47,-275.94 -310.94,-275.94 -281.42,-275.94 -458.83,-248.11 -429.05,-246.42 -370,-246.42 -340.47,-246.42 -281.42,-246.42 -424.05,991.42 -394.53,991.42 -365,991.42 -335.47,991.42 -305.94,991.42 -453.58,1020.94 -424.05,1020.94 -394.53,1020.94 -365,1020.94 -335.47,1020.94 -305.94,1020.94 -276.42,1020.94 -453.58,1050.47 -424.05,1050.47 -394.53,1050.47 -365,1050.47 -335.47,1050.47 -305.94,1050.47 -276.42,1050.47 -453.58,1080 -424.05,1080 -394.53,1080 -365,1080 -335.47,1080 -305.94,1080 -276.42,1080 -453.58,1109.53 -424.05,1109.53 -394.53,1109.53 -365,1109.53 -335.47,1109.53 -305.94,1109.53 -276.42,1109.53 -453.58,1139.06 -424.05,1139.06 -394.53,1139.06 -365,1139.06 -335.47,1139.06 -305.94,1139.06 -276.42,1139.06 -453.83,1166.89 -424.05,1168.58 -365,1168.58 -335.47,1168.58 -276.42,1168.58 -399.53,2441.42 -370,2441.42 -340.47,2441.42 -310.94,2441.42 -458.58,2470.94 -429.05,2470.94 -399.53,2470.94 -370,2470.94 -310.94,2470.94 -281.42,2470.94 -458.58,2500.47 -429.05,2500.47 -399.53,2500.47 -370,2500.47 -340.47,2500.47 -281.42,2500.47 -458.58,2530 -429.05,2530 -399.53,2530 -370,2530 -340.47,2530 -310.94,2530 -281.42,2530 -458.58,2559.53 -429.05,2559.53 -399.53,2559.53 -370,2559.53 -340.47,2559.53 -310.94,2559.53 -281.42,2559.53 -458.58,2589.06 -429.05,2589.06 -399.53,2589.06 -370,2589.06 -340.47,2589.06 -310.94,2589.06 -281.42,2589.06 -458.83,2616.89 -429.05,2618.58 -370,2618.58 -340.47,2618.58 -281.42,2618.58
IO22: DIGITAL.3
IO23: DIGITAL.4
IO24: DIGITAL.5
IO25: DIGITAL.6
IO26: DIGITAL.7
IO27: DIGITAL.8
IO28: DIGITAL.9
IO29: DIGITAL.10
IO30: DIGITAL.11
IO31: DIGITAL.12
IO32: DIGITAL.13
IO33: DIGITAL.14
IO34: DIGITAL.15
IO35: DIGITAL.16
IO36: DIGITAL.17
IO37: DIGITAL.18
IO38: DIGITAL.19
IO39: DIGITAL.20
IO40: DIGITAL.21
IO41: DIGITAL.22
IO42: DIGITAL.23
IO43: DIGITAL.24
IO44: DIGITAL.25
IO45: DIGITAL.26
IO46: DIGITAL.27
IO47: DIGITAL.28
IO48: DIGITAL.29
IO49: DIGITAL.30
IO50: DIGITAL.31
IO51: DIGITAL.32
IO52: DIGITAL.33
IO53: DIGITAL.34
MISO: DRIVER0.7 DRIVER1.7 DRIVER2.7 SPI_INTERFACE.1 | length 8710.4
  Top Layer w6.89: -360.16,-687 DRIVER2.7@-360.16,-499.37 ; -360.16,1960.16 DRIVER0.7@-360.16,2365.63 ; DRIVER1.7@-355.16,915.63 -355.16,885.78 -325,855.63 -325,720 -340.93,704.07
  Top Layer w10: v1(-835,650) -836.21,650 -990,496.21 -990,-662.36 -910.36,-742 -415.16,-742 -360.16,-687 ; v1(-525,745) -484.07,704.07 -340.93,704.07 ; -360.16,1960.16 -262.5,1862.5 -262.5,1612.29 -270,1604.79 -270,1376.72 v1(-273.52,1340)
  Bottom Layer w10: v1(-525,745) -620,650 v1(-835,650) -840,645 -950,645 -1025,720 -1025,1325 -985,1365 -835,1365 -765,1295 -765,1235 -730,1200 -695,1200 v5(-570,1325) -561.88,1325 -546.88,1310 -303.52,1310 -279.15,1334.38 v1@-268.12,1334.38 ; v1(-273.52,1340) -273.52,1339.77 v1@-268.12,1334.38 ; SPI_INTERFACE.1@2500,1200 692.61,1200 552.61,1340 -262.5,1340 v1@-268.12,1334.38